# Altium PCB Pcb.PcbDoc
Units mil, origin at the board's own origin, x right, y up, seen from the top; angles counter-clockwise.
Board outline 3543.32 x 3543.32 mil, 2 copper layers (Top Layer, Bottom Layer); 33 components, 119 nets, 297 pads, 74 vias.
Unrouted connection lines stored in the file: 2.
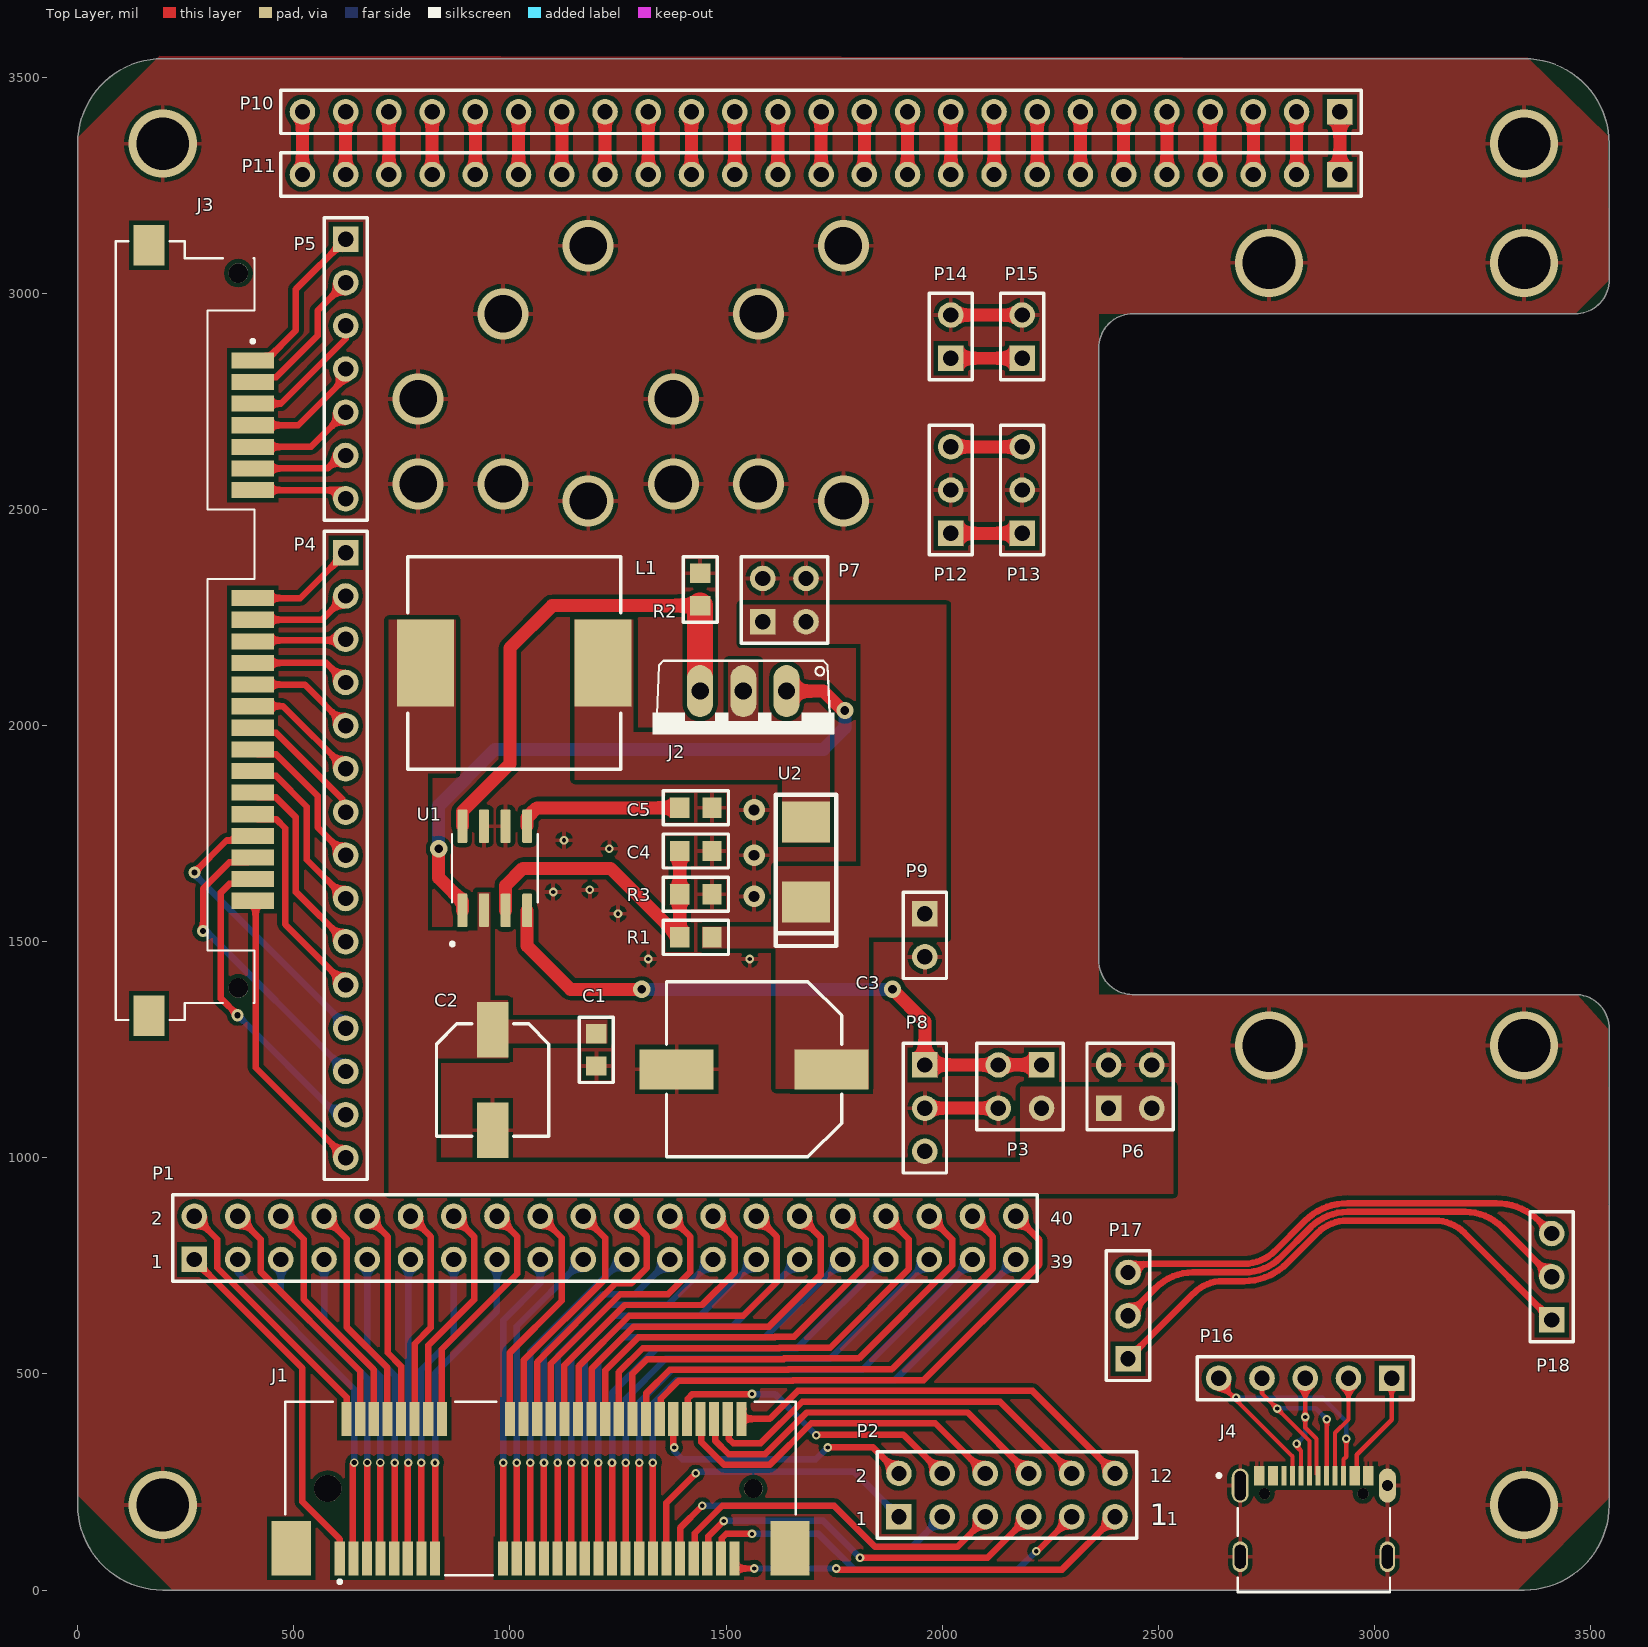
[diagram p0: Top Layer view]
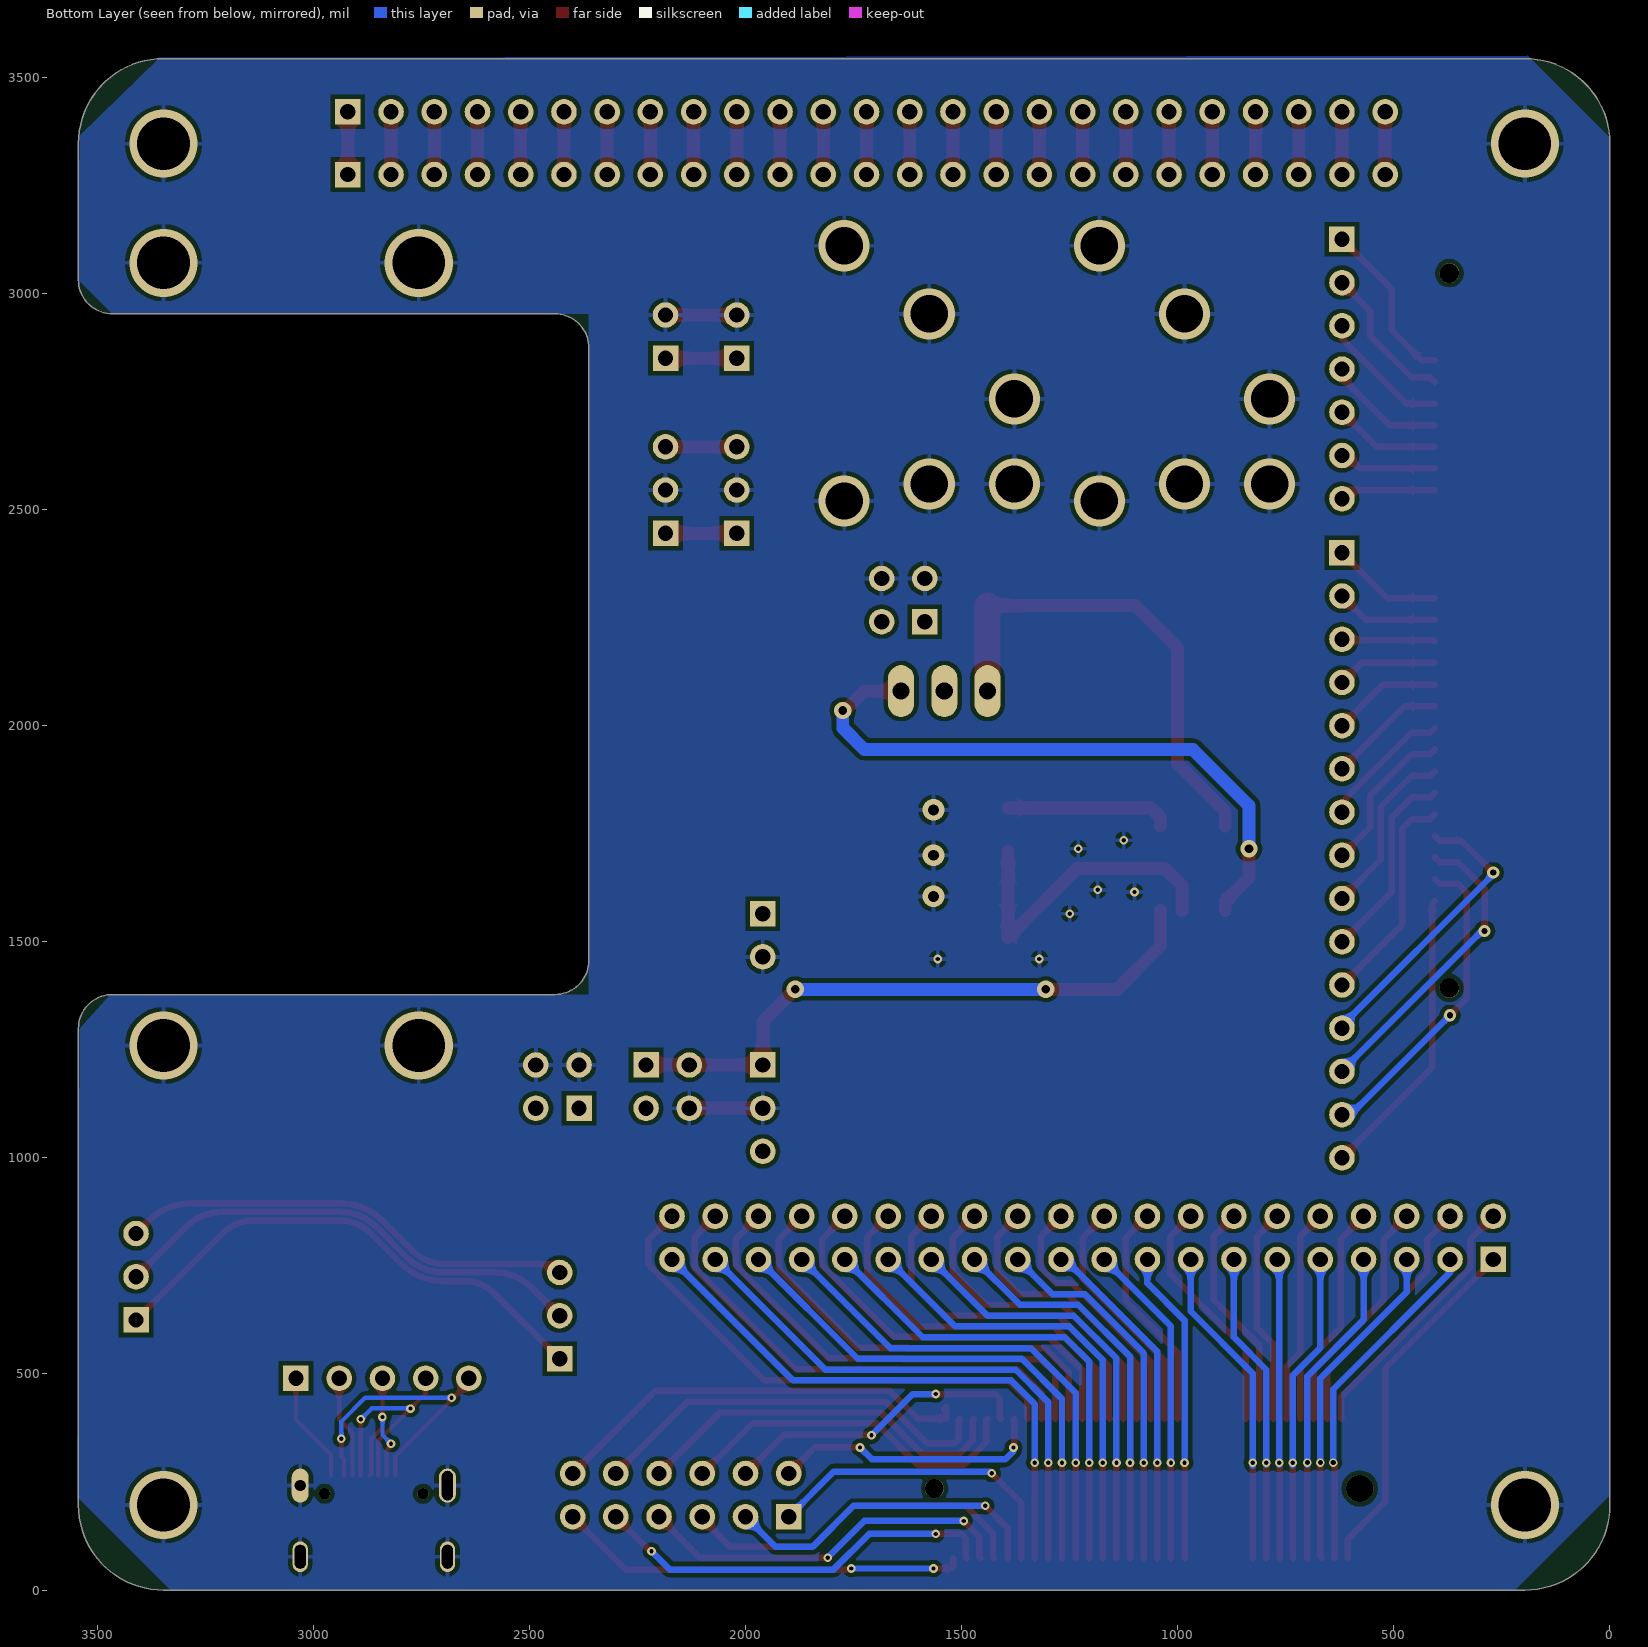
[diagram p1: Bottom Layer view, seen from below]

## Layer stack, top to bottom
Top Solder: solder mask 0.4, Solder Resist, Dk 3.5
Top Layer: signal copper 1.4
Dielectric 1: dielectric 12.6, FR-4, Dk 4.8
Bottom Layer: signal copper 1.4
Bottom Solder: solder mask 0.4, Solder Resist, Dk 3.5

## Board outline
-0.01,196.86 ccw(c196.85,196.86) 196.85,0 196.85,0.01 3346.46,0.01 3346.46,0 ccw(c3346.46,196.86) 3543.31,196.86 3543.31,1299.21 ccw(c3464.57,1299.21) 3464.57,1377.95 2440.94,1377.95 cw(c2440.94,1456.69) 2362.2,1456.69 2362.2,2874.02 cw(c2440.94,2874.02) 2440.94,2952.76 3464.57,2952.76 ccw(c3464.57,3031.5) 3543.31,3031.5 3543.31,3346.46 ccw(c3346.46,3346.46) 3346.46,3543.32 3346.46,3543.31 196.85,3543.31 196.85,3543.32 ccw(c196.85,3346.46) -0.01,3346.46 0,3346.46

## Design rules (kind name [scope] priority, off if disabled: settings)
Clearance [All] p1: gap=10 ignorepadtopadclearanceinfootprint=FALSE except(0: Arc-Hole Track-Hole SMDPad-Hole THPad-Hole Via-Hole Fill-Hole Poly-Hole Region-Hole Text-Hole; 5: Arc-Arc Arc-Track Arc-SMDPad Arc-Via Track-Track Track-SMDPad Track-Via SMDPad-SMDPad SMDPad-Via)
PolygonConnect PolygonConnect_3 [All vs IsNamedPolygon('Top Layer-12V')] p1: connectstyle=Direct reliefconductorwidth=10 reliefentries=4 polygonreliefangle="90 Angle" airgapwidth=10
PolygonConnect PolygonConnect_2 [All vs IsNamedPolygon('Top Layer-NetJ2_2')] p2: connectstyle=Direct reliefconductorwidth=10 reliefentries=4 polygonreliefangle="90 Angle" airgapwidth=10
PolygonConnect PolygonConnect_1 [All vs IsNamedPolygon('Top Layer-VH')] p3: thpad.connectstyle=Direct thpad.reliefconductorwidth=10 thpad.reliefentries=4 thpad.polygonreliefangle="90 Angle" thpad.airgapwidth=10 smdpad.connectstyle=Direct smdpad.reliefconductorwidth=10 smdpad.reliefentries=4 smdpad.polygonreliefangle="90 Angle" smdpad.airgapwidth=10 via.connectstyle=Relief via.reliefconductorwidth=10 via.reliefentries=4 via.polygonreliefangle="90 Angle" via.airgapwidth=10
PolygonConnect [All] p4: connectstyle=Relief reliefconductorwidth=10 reliefentries=4 polygonreliefangle="90 Angle" airgapwidth=10
RoutingVias [All] p1: holewidth=28 width=50 viastyle="Through Hole" minholewidth=5 minwidth=10 maxholewidth=196.85 maxwidth=314.96
SolderMaskExpansion [All] p1: expansion=4
Width [All] p1: maxlimit=100 minlimit=10 preferedwidth=10
30 further rules are at their usual default settings.

## Components (designator, comment, footprint, x,y, rotation, side; value= is the part's Value field where it differs from the comment)
C1 "100nF" 0805 1200,1250 r270 top
C2 "220uF" CAPAE7666X77M_6-3x7-7 960,1180 r270 top
C3 "10uF 250V" CAPAE113103X125M_10x12-5 1565,1205 r180 top
C4 "100nF" 0805 1430,1710 r0 top
C5 "100nF" 0805 1430,1810 r0 top
J1 "PCIE-52P-67910-5700" PCIE-52P-67910-5700 1000,235 r0 top
J2 "IRF840" TO220V 1540,1980 r180 top
J3 "SATA00100251" AMPHENOL_SATA00100251 371.54,2220 r270 top locked
J4 "USB_C_16P" USB_C_16P_CSP-USC16-TR 2859.84,265 r0 top locked
L1 "330uH" INDP125125X80N 1010,2145 r0 top
P1 "Header 20X2" HDR2X20 270,765 r0 top
P2 "Header 6X2" HDR2X6 1900,170 r0 top
P3 "Header 2X2" HDR2X2 2230,1215 r180 top
P4 "Header 15" HDR1X15 620,2400 r270 top locked
P5 "Header 7" HDR1X7 620,3125 r270 top locked
P6 "Header 2X2" HDR2X2 2385,1115 r0 top
P7 "Header 2X2" HDR2X2 1585,2240.59 r0 top
P8 "Header 3" HDR1X3 1960,1215 r270 top
P9 "Header 2" HDR1X2 1960,1565 r270 top
P10 "Header 25" HDR1X25 2920,3420 r180 top locked
P11 "Header 25" HDR1X25 2920,3275 r180 top locked
P12 "Header 3" HDR1X3 2020,2445 r90 top locked
P13 "Header 3" HDR1X3 2185,2445 r90 top locked
P14 "Header 2" HDR1X2 2020,2850 r90 top locked
P15 "Header 2" HDR1X2 2185,2850 r90 top locked
P16 "Header 5" HDR1X5 3040,490 r180 top
P17 "Header 3" HDR1X3 2430,535 r90 top
P18 "Header 3" HDR1X3 3410,625 r90 top
R1 "220K" 0805 1430,1510 r180 top
R2 "50m" 0805 1440,2315 r90 top
R3 "2K" 0805 1430,1610 r0 top
U1 "MAX1771CSA" MAX1771CSA 965,1670 r90 top
U2 "MURS160" MURS160 1685,1730 r270 top

## Footprints (in the part's own frame and the unit in brackets; to place one, negate y for a bottom-side part, rotate by r counter-clockwise, add the part's x,y. Pads: shape width x height; smd on the part's side, far side on the other; paste and mask are expansions set on the pad)
0805 [mm]
  rect 1.14x1.2 smd: 1(-0.95,0) 2(0.95,0)
  silkscreen extent -1.92,-1 1.92,1, body extent -1,-0.6 1,0.6, height 0.45
AMPHENOL_SATA00100251 [mm]
  rect 0.95x2.5 smd mask+0.05: P1(-1.905,0.85) P2(-0.635,0.85) P3(0.635,0.85) P4(1.905,0.85) P5(3.175,0.85) P6(4.445,0.85) P7(5.715,0.85) P8(6.985,0.85) P9(8.255,0.85) P10(9.525,0.85) P11(10.795,0.85) P12(12.065,0.85) P13(13.335,0.85) P14(14.605,0.85) P15(15.875,0.85) S1(-15.875,0.85) S2(-14.605,0.85) S3(-13.335,0.85) S4(-12.065,0.85) S5(-10.795,0.85) S6(-9.525,0.85) S7(-8.255,0.85)
  rect 2.39x1.8 smd mask+0.05: SH1(-22.645,-5.25) SH2(22.645,-5.25)
  round 1.15 hole 1.15 unplated: ""(-21,0) ""(21,0)
  silkscreen extent -22.88,-7.2 22.88,0.95, body extent -23.4,-9.05 23.4,1.82, height 3.69
CAPAE7666X77M_6-3x7-7 [mm] "Aluminum Electrolytic Capacitor, Body 6.60x6.60x7.70mm, IPC Low Density"
  rect 3.25x1.85 smd: 1(-2.95,0) 2(2.95,0)
  silkscreen extent -3.3,-3.3 3.3,3.3, body extent -3.3,-3.3 3.3,3.3, height 7.7
CAPAE113103X125M_10x12-5 [mm] "Aluminum Electrolytic Capacitor, Body 10.30x10.30x12.50mm, IPC Low Density"
  rect 4.35x2.35 smd: 1(-4.55,0) 2(4.55,0)
  silkscreen extent -5.15,-5.15 5.15,5.15, body extent -5.15,-5.15 5.15,5.15, height 12.5
HDR1X2 [mm] "Connector; Header; 2 Position"
  rect 1.5x1.5 hole 0.9: 1(0,0)
  round 1.5 hole 0.9: 2(2.54,0)
  silkscreen extent -1.27,-1.27 3.81,1.27
HDR1X3 [mm] "Connector; Header; 3 Position"
  rect 1.5x1.5 hole 0.9: 1(0,0)
  round 1.5 hole 0.9: 2(2.54,0) 3(5.08,0)
  silkscreen extent -1.27,-1.27 6.35,1.27
HDR1X5 [mm] "Connector; Header; 5 Position"
  rect 1.5x1.5 hole 0.9: 1(0,0)
  round 1.5 hole 0.9: 2(2.54,0) 3(5.08,0) 4(7.62,0) 5(10.16,0)
  silkscreen extent -1.27,-1.27 11.43,1.27
HDR1X7 [mm] "Connector; Header; 7 Position"
  rect 1.5x1.5 hole 0.9: 1(0,0)
  round 1.5 hole 0.9: 2(2.54,0) 3(5.08,0) 4(7.62,0) 5(10.16,0) 6(12.7,0) 7(15.24,0)
  silkscreen extent -1.27,-1.27 16.51,1.27
HDR1X15 [mm] "Connector; Header; 15 Position"
  rect 1.5x1.5 hole 0.9: 1(0,0)
  round 1.5 hole 0.9: 2(2.54,0) 3(5.08,0) 4(7.62,0) 5(10.16,0) 6(12.7,0) 7(15.24,0) 8(17.78,0) 9(20.32,0) 10(22.86,0) 11(25.4,0) 12(27.94,0) 13(30.48,0) 14(33.02,0) 15(35.56,0)
  silkscreen extent -1.27,-1.27 36.83,1.27
HDR1X25 [mm] "Connector; Header; 25 Position"
  rect 1.5x1.5 hole 0.9: 1(0,0)
  round 1.5 hole 0.9: 2(2.54,0) 3(5.08,0) 4(7.62,0) 5(10.16,0) 6(12.7,0) 7(15.24,0) 8(17.78,0) 9(20.32,0) 10(22.86,0) 11(25.4,0) 12(27.94,0) 13(30.48,0) 14(33.02,0) 15(35.56,0) 16(38.1,0) 17(40.64,0) 18(43.18,0) 19(45.72,0) 20(48.26,0) 21(50.8,0) 22(53.34,0) 23(55.88,0) 24(58.42,0) 25(60.96,0)
  silkscreen extent -1.27,-1.27 62.23,1.27
HDR2X2 [mm] "Connector; Header; 2x2 Position"
  rect 1.5x1.5 hole 0.9: 1(0,0)
  round 1.5 hole 0.9: 2(0,2.54) 3(2.54,0) 4(2.54,2.54)
  silkscreen extent -1.27,-1.27 3.81,3.81
HDR2X6 [mm] "Connector; Header; 6x2 Position"
  rect 1.5x1.5 hole 0.9: 1(0,0)
  round 1.5 hole 0.9: 2(0,2.54) 3(2.54,0) 4(2.54,2.54) 5(5.08,0) 6(5.08,2.54) 7(7.62,0) 8(7.62,2.54) 9(10.16,0) 10(10.16,2.54) 11(12.7,0) 12(12.7,2.54)
  silkscreen extent -1.27,-1.27 13.97,3.81
HDR2X20 [mm] "Connector; Header; 20x2 Position"
  rect 1.5x1.5 hole 0.9: 1(0,0)
  round 1.5 hole 0.9: 2(0,2.54) 3(2.54,0) 4(2.54,2.54) 5(5.08,0) 6(5.08,2.54) 7(7.62,0) 8(7.62,2.54) 9(10.16,0) 10(10.16,2.54) 11(12.7,0) 12(12.7,2.54) 13(15.24,0) 14(15.24,2.54) 15(17.78,0) 16(17.78,2.54) 17(20.32,0) 18(20.32,2.54) 19(22.86,0) 20(22.86,2.54) 21(25.4,0) 22(25.4,2.54) 23(27.94,0) 24(27.94,2.54) 25(30.48,0) 26(30.48,2.54) 27(33.02,0) 28(33.02,2.54) 29(35.56,0) 30(35.56,2.54) 31(38.1,0) 32(38.1,2.54) 33(40.64,0) 34(40.64,2.54) 35(43.18,0) 36(43.18,2.54) 37(45.72,0) 38(45.72,2.54) 39(48.26,0) 40(48.26,2.54)
  silkscreen extent -1.27,-1.27 49.53,3.81
INDP125125X80N [mm] "Precision Wire Wound Inductor, 2-Leads, Body 12.50x12.50mm, IPC Medium Density"
  rect 3.35x5.1 smd: 1(-5.225,0) 2(5.225,0)
  silkscreen extent -6.25,-6.25 6.25,6.25, body extent -6.25,-6.25 6.25,6.25, height 8
MAX1771CSA [mm]
  rrect25% 1.97x0.59 smd: 1(-2.475,1.905) 2(-2.475,0.635) 3(-2.475,-0.635) 4(-2.475,-1.905) 5(2.475,-1.905) 6(2.475,-0.635) 7(2.475,0.635) 8(2.475,1.905)
  silkscreen extent -4.54,-2.52 2,2.59, body extent -3,-2.45 3,2.45, height 1.75
MURS160 [mm]
  rect 2.4x2.8 smd: 1(-1.2,0) 2(3.5,0)
  silkscreen extent -2.79,-1.78 6.1,1.78
PCIE-52P-67910-5700 [mm]
  rect 0.6x2 smd: 1(-10,-4.1) 2(-9.6,4.1) 3(-9.2,-4.1) 4(-8.8,4.1) 5(-8.4,-4.1) 6(-8,4.1) 7(-7.6,-4.1) 8(-7.2,4.1) 9(-6.8,-4.1) 10(-6.4,4.1) 11(-6,-4.1) 12(-5.6,4.1) 13(-5.2,-4.1) 14(-4.8,4.1) 15(-4.4,-4.1) 16(-4,4.1) 17(-0.4,-4.1) 18(0,4.1) 19(0.4,-4.1) 20(0.8,4.1) 21(1.2,-4.1) 22(1.6,4.1) 23(2,-4.1) 24(2.4,4.1) 25(2.8,-4.1) 26(3.2,4.1) 27(3.6,-4.1) 28(4,4.1) 29(4.4,-4.1) 30(4.8,4.1) 31(5.2,-4.1) 32(5.6,4.1) 33(6,-4.1) 34(6.4,4.1) 35(6.8,-4.1) 36(7.2,4.1) 37(7.6,-4.1) 38(8,4.1) 39(8.4,-4.1) 40(8.8,4.1) 41(9.2,-4.1) 42(9.6,4.1) 43(10,-4.1) 44(10.4,4.1) 45(10.8,-4.1) 46(11.2,4.1) 47(11.6,-4.1) 48(12,4.1) 49(12.4,-4.1) 50(12.8,4.1) 51(13.2,-4.1) 52(13.6,4.1)
  rect 2.3x3.2 smd: 53(-12.85,-3.5) 54(16.45,-3.5)
  round 1.6 hole 1.6 unplated: ""(-10.7,0)
  round 1.1 hole 1.1 unplated: ""(14.3,0)
  silkscreen extent -13.2,-5.57 16.8,5.1
TO220V [mil]
  oval 60x120 hole 40: 1(-100,-100) 2(0,-100) 3(100,-100)
  silkscreen extent -210,-170 210,0, body extent -202,-88 202,88, height 750
USB_C_16P_CSP-USC16-TR [mm]
  rect 0.3x1.14 smd: A1(-3.35,0) A4(-2.55,0) A5(-1.25,0) A6(-0.25,0) A7(0.25,0) A8(1.25,0) A9(2.55,0) A12(3.35,0) B1(3.05,0) B4(2.25,0) B5(1.75,0) B6(0.75,0) B7(-0.75,0) B8(-1.75,0) B9(-2.25,0) B12(-3.05,0)
  oval 1x2 hole 0.65 slot 1.72 at 90 deg: S1(-4.325,-0.59)
  oval 1x2 hole 0.65: S2(4.325,-0.59)
  oval 0.9x1.8 hole 0.65 slot 1.4 at 90 deg: S3(-4.325,-4.77) S4(4.325,-4.77)
  round 0.65 hole 0.65 unplated: ""(-2.89,-1.07) ""(2.89,-1.07)
  silkscreen extent -5.67,-6.86 4.47,0.1, body extent -4.47,-6.28 4.47,1.47, height 3.26

## Part data
C1 C4 C5: library part Capacitor
C2 C3: library part CapacitorPolarized
J1: "Conn Mini PCI Express Card Edge F 52 POS 0.8mm Solder RA SMD Mini PCI Express Embossed T/R", Package=None, Availability=Unavailable, MP=67910-5700, Price=None
J2: "N-Channel 500 V 8A (Tc) 3.1W (Tc) Through Hole TO-220FP", Package="TO-220 Vishay", Availability="In Stock", Check_prices=https://www.snapeda.com/parts/IRF630/STMicroelectronics/view-part/?ref=eda, MF=STMicroelectronics, MP=IRF630, Price=None, Purchase-URL=https://pricing.snapeda.com/search/part/IRF630/?ref=eda, SnapEDA_Link=https://www.snapeda.com/parts/IRF630/STMicroelectronics/view-part/?ref=snap
J3: "I/O Connectors SATA RA PLUG", Package=None, Availability="In Stock", Check_prices=https://www.snapeda.com/parts/SATA00100251/Amphenol/view-part/?ref=eda, MF="Amphenol FCI", MP=SATA00100251, Price=None, Purchase-URL=https://pricing.snapeda.com/search/part/SATA00100251/?ref=eda, SnapEDA_Link=https://www.snapeda.com/parts/SATA00100251/Amphenol/view-part/?ref=snap
J4: "CSP-USC16-TR Valcon USB Type C Surface Mount PCB Socket", Package=None, Availability="In Stock", Check_prices=https://www.snapeda.com/parts/CSP-USC16-TR/Valcon/view-part/?ref=eda, MF=Valcon, MP=CSP-USC16-TR, Price=None, Purchase-URL=https://pricing.snapeda.com/search/part/CSP-USC16-TR/?ref=eda, SnapEDA_Link=https://www.snapeda.com/parts/CSP-USC16-TR/Valcon/view-part/?ref=snap
L1: library part Inductor
P1: "Header, 20-Pin, Dual row", LatestRevisionDate=17-Jul-2002, LatestRevisionNote="Re-released for DXP Platform.", Publisher="Altium Limited"
P2: "Header, 6-Pin, Dual row", LatestRevisionDate=17-Jul-2002, LatestRevisionNote="Re-released for DXP Platform.", Publisher="Altium Limited"
P3 P6 P7: "Header, 2-Pin, Dual row", LatestRevisionDate=17-Jul-2002, LatestRevisionNote="Re-released for DXP Platform.", Publisher="Altium Limited"
P4: "Header, 15-Pin", LatestRevisionDate=17-Jul-2002, LatestRevisionNote="Re-released for DXP Platform.", Publisher="Altium Limited"
P5: "Header, 7-Pin", LatestRevisionDate=17-Jul-2002, LatestRevisionNote="Re-released for DXP Platform.", Publisher="Altium Limited"
P8 P12 P13 P17 P18: "Header, 3-Pin", LatestRevisionDate=17-Jul-2002, LatestRevisionNote="Re-released for DXP Platform.", Publisher="Altium Limited"
P9 P14 P15: "Header, 2-Pin", LatestRevisionDate=17-Jul-2002, LatestRevisionNote="Re-released for DXP Platform.", Publisher="Altium Limited"
P10 P11: "Header, 25-Pin", LatestRevisionDate=17-Jul-2002, LatestRevisionNote="Re-released for DXP Platform.", Publisher="Altium Limited"
P16: "Header, 5-Pin", LatestRevisionDate=17-Jul-2002, LatestRevisionNote="Re-released for DXP Platform.", Publisher="Altium Limited"
R1 R2 R3: library part Resistor
U1: "Boost, Buck-Boost Regulator Positive Output Step-Up, Step-Up/Step-Down - DC-DC Controller IC 8-SOIC", Package="SOIC-8 Maxim", Availability="In Stock", Check_prices=https://www.snapeda.com/parts/MAX1771CSA/Maxim+Integrated/view-part/?ref=eda, MF="Maxim Integrated", MP=MAX1771CSA, Price=None, Purchase-URL=https://pricing.snapeda.com/search/part/MAX1771CSA/?ref=eda, SnapEDA_Link=https://www.snapeda.com/parts/MAX1771CSA/Maxim+Integrated/view-part/?ref=snap
U2: "Diode Standard 600V 1A Surface Mount SMB", Package="DO-214AA-214 World Products", Availability=Unavailable, MF="World Products", MP=MURS160, Price=None, SnapEDA_Link=https://www.snapeda.com/parts/MURS160/World%20Products/view-part/564901/?ref=snap

## Via types
v1: diameter 20, hole 10, Top Layer to Bottom Layer, 41 vias
v2: diameter 118.11, hole 86.61, Top Layer to Bottom Layer, 12 vias
v3: diameter 157.48, hole 122.05, Top Layer to Bottom Layer, 8 vias
v4: diameter 40, hole 20, Top Layer to Bottom Layer, 4 vias
v5: diameter 50, hole 25, Top Layer to Bottom Layer, 3 vias
v6: diameter 20, hole 12, Top Layer to Bottom Layer, 3 vias
v7: diameter 28, hole 14, Top Layer to Bottom Layer, 3 vias

## Nets (pads, with @x,y where several pads share a name; then routed paths per layer and width w, separated by ;. In a path a pad name is that pad's centre, name@x,y a point inside that pad or via, vN(x,y) a via of type N, cw(c..) or ccw(c..) an arc to the next point about the centre after c; other vN are vias at no path point)
12V: C1.1 C2.1 L1.1 P3.2 P6.1 P6.3 P8.3 U1.2
CC: J4.A5 J4.B5 P16.5 | length 704
  Top Layer w10: P16.5 2640,480 2675,445 v1(2680,445) 2680,440 2810.63,309.37 J4.A5 ; J4.B5 2928.74,302.44 2935,308.7 v1(2935,350)
  Bottom Layer w10: v1(2680,445) 2880,445 2935,390 v1(2935,350)
CONNECT_1: P10.1 P11.1 | length 145
  Top Layer w30: P11.1 P10.1
CONNECT_2: P10.2 P11.2 | length 145
  Top Layer w30: P11.2 P10.2
CONNECT_3: P10.3 P11.3 | length 145
  Top Layer w30: P11.3 P10.3
CONNECT_4: P10.4 P11.4 | length 145
  Top Layer w30: P11.4 P10.4
CONNECT_5: P10.5 P11.5 | length 145
  Top Layer w30: P11.5 P10.5
CONNECT_6: P10.6 P11.6 | length 145
  Top Layer w30: P11.6 P10.6
CONNECT_7: P10.7 P11.7 | length 145
  Top Layer w30: P11.7 P10.7
CONNECT_8: P10.8 P11.8 | length 145
  Top Layer w30: P11.8 P10.8
CONNECT_9: P10.9 P11.9 | length 145
  Top Layer w30: P11.9 P10.9
CONNECT_10: P10.10 P11.10 | length 145
  Top Layer w30: P11.10 P10.10
CONNECT_11: P10.11 P11.11 | length 145
  Top Layer w30: P11.11 P10.11
CONNECT_12: P10.12 P11.12 | length 145
  Top Layer w30: P11.12 P10.12
CONNECT_13: P10.13 P11.13 | length 145
  Top Layer w30: P11.13 P10.13
CONNECT_14: P10.14 P11.14 | length 145
  Top Layer w30: P11.14 P10.14
CONNECT_15: P10.15 P11.15 | length 145
  Top Layer w30: P11.15 P10.15
CONNECT_16: P10.16 P11.16 | length 145
  Top Layer w30: P11.16 P10.16
CONNECT_17: P10.17 P11.17 | length 145
  Top Layer w30: P11.17 P10.17
CONNECT_18: P10.18 P11.18 | length 145
  Top Layer w30: P11.18 P10.18
CONNECT_19: P10.19 P11.19 | length 145
  Top Layer w30: P11.19 P10.19
CONNECT_20: P10.20 P11.20 | length 145
  Top Layer w30: P11.20 P10.20
CONNECT_21: P10.21 P11.21 | length 145
  Top Layer w30: P11.21 P10.21
CONNECT_22: P10.22 P11.22 | length 145
  Top Layer w30: P11.22 P10.22
CONNECT_23: P10.23 P11.23 | length 145
  Top Layer w30: P11.23 P10.23
CONNECT_24: P10.24 P11.24 | length 145
  Top Layer w30: P11.24 P10.24
CONNECT_25: P10.25 P11.25 | length 145
  Top Layer w30: P11.25 P10.25
CURVE_1: P17.1 P18.1 | length 1189
  Top Layer w15: P17.1 2581.72,686.72 cw(c2650,618.43) 2650,715 2698.58,715 ccw(c2698.58,855) 2797.57,756.01 2867.28,825.71 cw(c2937.99,755) 2937.99,855 3138.58,855 cw(c3138.58,755) 3209.29,825.71 P18.1
CURVE_2: P17.2 P18.2 | length 1120.9
  Top Layer w15: P17.2 2494.85,699.85 cw(c2579.71,615) 2579.71,735 2698.58,735 ccw(c2698.58,855) 2783.43,770.15 2853.14,839.85 cw(c2937.99,755) 2937.99,875 3210.29,875 cw(c3210.29,755) 3295.15,839.85 P18.2
CURVE_3: P17.3 P18.3 | length 1056
  Top Layer w15: P17.3 cw(c2478.28,686.72) 2478.28,755 2698.58,755 ccw(c2698.58,855) 2769.29,784.29 2838.99,853.99 cw(c2937.99,755) 2937.99,895 3282.01,895 cw(c3282.01,755) 3381.01,853.99 P18.3
DN: J4.A7 J4.B7 P16.3 | length 385.5
  Top Layer w10: v1(2820,338.85) 2820,332.71 2830.31,322.39 J4.B7 ; P16.3 v1(2840,400.64) 2840,376.21 2865.91,350.31 2865.91,268.78 J4.A7
  Bottom Layer w10: v1(2820,338.85) 2840,358.85 v1(2840,400.64)
DP: J4.A6 J4.B6 P16.4 | length 526.7
  Top Layer w10: P16.4 2740,455 2850,345 J4.A6 ; J4.B6 2890,265.63 v1(2890,395)
  Bottom Layer w10: v1(2775,420) 2775.64,420.64 2864.36,420.64 v1(2890,395)
EXT: J2.1 U1.1 | length 1473.4
  Top Layer w30: v4(835,1715) 835,1647.95 890,1592.95 U1.1 ; J2.1 1725,2080 1770,2035 v4(1775,2035)
  Bottom Layer w30: v4(835,1715) 835,1815 965,1945 1725,1945 1775,1995 v4(1775,2035)
EXT_12V: P12.3 P13.3 | length 165
  Top Layer w30: P12.3 P13.3
EXT_SHDN: P12.1 P13.1 | length 165
  Top Layer w30: P12.1 P13.1
EXT_VH: P14.1 P15.1 | length 165
  Top Layer w30: P14.1 P15.1
FB: C4.1 R1.2 R3.1 U1.3 | length 742.9
  Top Layer w30: U1.3 990,1630 1030,1670 1232.6,1670 R1.2 R3.1 C4.1
GND: C1.2 C2.2 C3.2 C4.2 C5.2 J4.A1 J4.A12 J4.B1 J4.B12 J4.S1 J4.S2 J4.S3 J4.S4 P3.4 P6.2 P6.4 P7.2 P7.4 P8.2 P9.2 P12.2 P13.2 P14.2 P15.2 R2.2 R3.2 U1.6 U1.7 | length 335
  Top Layer w30: P8.2 P3.4 ; P14.2 P15.2
  other v1: 1320,1460 1555,1460 1250,1565 1100,1615 1185,1620 1230,1715 1125,1735
  other v2: 1181.1,2519.68 1771.65,2519.68 787.4,2559.06 984.25,2559.06 1377.95,2559.06 1574.8,2559.06 787.4,2755.91 1377.95,2755.91 984.25,2952.76 1574.8,2952.76 1181.1,3110.24 1771.65,3110.24
  other v3: 196.84,196.85 3346.45,196.85 2755.91,1259.84 3346.46,1259.84 2755.91,3070.87 3346.46,3070.87 196.84,3346.46 3346.45,3346.46
  other v5: 1565,1605 1565,1700 1565,1805
NetC5_1: C5.1 U1.5 | length 382.2
  Top Layer w30: U1.5 1040,1787.83 1062.17,1810 C5.1
NetJ2_2: J2.2 L1.2 U2.1 | length 30
  Top Layer w30: J2.2@1540,2050 J2.2
NetJ2_3: J2.3 R2.1 U1.8 | length 1136.1
  Top Layer w30: U1.8 890,1801.49 1000,1911.49 1000,2180 1097.6,2277.6 R2.1
  Top Layer w60: J2.3 R2.1
PCIE_1: J1.1 P1.1 | length 830.7
  Top Layer w15: P1.1 270,763.14 520,513.14 520,204.32 606.3,118.02 J1.1
PCIE_2: J1.2 P1.2 | length 614.4
  Top Layer w15: P1.2 322.97,812.03 322.97,745.52 622.05,446.45 J1.2
PCIE_3: J1.3 P1.3 | length 805.3
  Top Layer w15: J1.3 636.4,74.98 636.4,291.4 v6(640,295)
  Bottom Layer w15: P1.3 370,735 640,465 v6(640,295)
PCIE_4: J1.4 P1.4 | length 586
  Top Layer w15: P1.4 422.97,812.03 422.97,737.03 653.54,506.46 J1.4
PCIE_5: J1.5 P1.5 | length 773.5
  Top Layer w15: J1.5@667.5,75.37 670,77.87 v6(670,295)
  Bottom Layer w15: P1.5 470,689.64 670,489.64 v6(670,295)
PCIE_6: J1.6 P1.6 | length 557.7
  Top Layer w15: P1.6 522.97,812.03 522.97,672.38 685.04,510.32 J1.6
PCIE_7: J1.7 P1.7 | length 745.6
  Top Layer w15: v6@700,290 700,74.37 J1.7
  Bottom Layer w15: P1.7 570,625 700,495 v6(700,295) v6@700,290
PCIE_8: J1.8 P1.8 | length 529.3
  Top Layer w15: P1.8 622.97,812.03 622.97,607.74 716.54,514.18 J1.8
PCIE_9: J1.9 P1.9 | length 718.3
  Top Layer w15: J1.9 733.64,74.94 v1@733.64,288.64
  Bottom Layer w15: P1.9 670,560.36 733.64,496.71 v1(733.64,295) v1@733.64,288.64
PCIE_10: J1.10 P1.10 | length 500.9
  Top Layer w15: P1.10 717.03,817.97 717.03,549.04 748.03,518.03 J1.10
PCIE_11: J1.11 P1.11 | length 694
  Top Layer w15: J1.11 763.78,288.78 v1@765,290
  Bottom Layer w15: v1@765,290 765,760 P1.11
  other v1: 765,295
PCIE_12: J1.12 P1.12 | length 503.6
  Top Layer w15: P1.12 817.03,817.97 817.03,607.38 779.53,569.88 J1.12
PCIE_13: J1.13 P1.13 | length 722.6
  Top Layer w15: v1@795,290 795,73.86 J1.13
  Bottom Layer w15: v1@795,290 v1(795,295) 795,510 870,585 P1.13
PCIE_14: J1.14 P1.14 | length 532
  Top Layer w15: J1.14 811.02,566.02 917.03,672.03 917.03,817.97 P1.14
PCIE_15: J1.15 P1.15 | length 750.7
  Top Layer w15: J1.15 v1@826.77,288.23
  Bottom Layer w15: v1@826.77,288.23 v1(826.77,295) 826.77,501.77 970,645 P1.15
PCIE_16: J1.16 P1.16 | length 560.3
  Top Layer w15: J1.16 842.52,557.52 1017.03,732.03 1017.03,817.97 P1.16
PCIE_17: J1.17 P1.17 | length 726.9
  Top Layer w15: J1.17 v1(984.25,295)
  Bottom Layer w15: v1(984.25,295) 984.25,623.9 1070,709.64 P1.17
PCIE_18: J1.18 P1.18 | length 539
  Top Layer w15: J1.18 1000,549.64 1120,669.64 1120,815 P1.18
PCIE_19: J1.19 P1.19 | length 755.3
  Top Layer w15: J1.19 v1(1015.75,295)
  Bottom Layer w15: v1(1015.75,295) 1015.75,610.75 P1.19
PCIE_20: J1.20 P1.20 | length 567.4
  Top Layer w15: J1.20 1031.5,531.5 1220,720 1220,815 P1.20
PCIE_21: J1.21 P1.21 | length 789.5
  Top Layer w15: J1.21 v1(1047.24,295)
  Bottom Layer w15: v1(1047.24,295) 1047.24,552.24 1260,765 P1.21
PCIE_22: J1.22 P1.22 | length 614.5
  Top Layer w15: J1.22 1062.99,527.64 1245,709.64 1281.15,709.64 1317.03,745.52 1317.03,817.97 P1.22
PCIE_23: J1.23 P1.23 | length 855.8
  Top Layer w15: J1.23 v1(1078.74,295)
  Bottom Layer w15: v1(1078.74,295) 1078.74,548.38 1215.36,685 1290,685 P1.23
PCIE_24: J1.24 P1.24 | length 686.4
  Top Layer w15: J1.24 1094.49,523.78 1255.36,684.64 1365.86,684.64 1417.03,735.81 1417.03,817.97 P1.24
PCIE_25: J1.25 P1.25 | length 919.5
  Top Layer w15: J1.25 v1(1110.24,295)
  Bottom Layer w15: v1(1110.24,295) 1110.24,540.24 1230,660 1365,660 P1.25
PCIE_26: J1.26 P1.26 | length 757.3
  Top Layer w15: J1.26 1125.98,519.92 1265.71,659.64 1444.64,659.64 1520,735 1520,815 P1.26
PCIE_27: J1.27 P1.27 | length 985.8
  Top Layer w15: J1.27 v1(1141.73,295)
  Bottom Layer w15: v1(1141.73,295) 1141.73,536.38 1240.36,635 1440,635 P1.27
PCIE_28: J1.28 P1.28 | length 832.8
  Top Layer w15: J1.28 1159.67,398.6 1159.67,518.24 1276.07,634.64 1539.64,634.64 1617.03,712.03 1617.03,817.97 P1.28
PCIE_29: J1.29 P1.29 | length 1052
  Top Layer w15: J1.29 v1(1173.23,295)
  Bottom Layer w15: v1(1173.23,295) 1173.23,532.52 1250.71,610 1515,610 P1.29
PCIE_30: J1.30 P1.30 | length 891.7
  Top Layer w15: J1.30 1188.98,512.2 1286.42,609.64 1599.64,609.64 1718.79,728.79 1718.79,816.21 P1.30
PCIE_31: J1.31 P1.31 | length 1118.2
  Top Layer w15: J1.31 v1(1204.72,295)
  Bottom Layer w15: v1(1204.72,295) 1204.72,528.66 1261.07,585 1590,585 P1.31
PCIE_32: J1.32 P1.32 | length 950.6
  Top Layer w15: J1.32 1220.47,508.34 1296.78,584.64 1612.91,584.64 1614.18,585.92 1657.42,585.92 1822.97,751.47 1822.97,812.03 P1.32
PCIE_33: J1.33 P1.33 | length 1144.3
  Top Layer w15: J1.33 v1(1236.22,295)
  Bottom Layer w15: v1(1236.22,295) 1236.22,456.22 1340,560 1665,560 P1.33
PCIE_34: J1.34 P1.34 | length 1021.8
  Top Layer w15: J1.34 1251.97,504.48 1307.13,559.64 1623.27,559.64 1624.54,560.92 1740.92,560.92 1922.97,742.97 1922.97,812.03 P1.34
PCIE_35: J1.35 P1.35 | length 1204.7
  Top Layer w15: J1.35 v1(1267.72,295)
  Bottom Layer w15: v1(1267.72,295) 1267.72,442.36 1360.36,535 1740,535 P1.35
PCIE_36: J1.36 P1.36 | length 1083.1
  Top Layer w15: J1.36 1283.46,500.62 1317.49,534.64 1633.62,534.64 1634.89,535.92 1807.42,535.92 2022.97,751.47 2022.97,812.03 P1.36
PCIE_37: J1.37 P1.37 | length 1268.4
  Top Layer w15: J1.37 v1(1299.21,295)
  Bottom Layer w15: v1(1299.21,295) 1299.21,434.21 1375,510 1815,510 P1.37
PCIE_38: J1.38 P1.38 | length 1120.8
  Top Layer w15: J1.38 1314.96,454.96 1369.64,509.64 1643.98,509.64 1645.25,510.92 1883.89,510.92 2117.03,744.06 2117.03,817.97 P1.38
PCIE_39: J1.39 P1.39 | length 1334.7
  Top Layer w15: J1.39 v1(1330.71,295)
  Bottom Layer w15: v1(1330.71,295) 1330.71,430.35 1385.36,485 1890,485 P1.39
PCIE_40: J1.40 P1.40 | length 1186.8
  Top Layer w15: J1.40 1348.64,398.6 1348.64,443.04 1390.25,484.64 1654.33,484.64 1655.61,485.92 1957.42,485.92 2225,753.49 2225,810 P1.40
PCIE_41: J1.41 P2.1 | length 739.4
  Top Layer w15: J1.41 1362.2,202.2 v1(1430,270)
  Bottom Layer w15: v1(1430,270) 1434.15,274.15 1795.85,274.15 P2.1
PCIE_42: J1.42 P2.2 | length 643.2
  Top Layer w15: v1(1380,330) 1377.95,332.05 J1.42 J1.42@1380.14,394.23 ; v1(1735,330) 1840,330 P2.2
  Bottom Layer w15: v1(1380,330) 1380,321.11 1398.61,302.5 1707.5,302.5 v1(1735,330)
PCIE_43: J1.43 P2.3 | length 766
  Top Layer w15: J1.43 1393.7,143.7 v1(1445,195)
  Bottom Layer w15: v1(1445,195) 1750,195 1845,100 1930,100 P2.3
PCIE_44: J1.44 P2.4 | length 718.5
  Top Layer w15: J1.44 1410,395.87 1411.63,397.5 1411.63,443.04 1422.26,453.66 v1(1559.98,453.66) ; v1(1708.42,358.42) 1709.64,359.64 1910.36,359.64 P2.4
  Bottom Layer w15: v1(1559.98,453.66) 1613.17,453.66 v1(1708.42,358.42)
PCIE_45: J1.45 P2.5 | length 828.9
  Top Layer w15: J1.45 1427.38,75.77 1427.38,131.27 1491.11,195 1750,195 1845,100 2035,100 2100,165 P2.5
PCIE_46: J1.46 P2.6 | length 821.8
  Top Layer w15: J1.46 1443.13,394.23 1443.13,342.08 1495.66,289.55 1600.66,289.55 1697.03,385.92 1984.08,385.92 P2.6
PCIE_47: J1.47 P2.7 | length 882
  Top Layer w15: J1.47 1458.88,75.77 1458.88,124.06 1494.82,160 v1(1495,160) ; v1(1810,75) 2105,75 P2.7
  Bottom Layer w15: v1(1495,160) 1725,160 v1(1810,75)
PCIE_48: J1.48 P2.8 | length 888
  Top Layer w15: J1.48 1474.63,394.23 1474.63,345.94 1506.02,314.55 1590.3,314.55 1686.67,410.92 2059.08,410.92 P2.8
PCIE_49: J1.49 P2.9 | length 946.5
  Top Layer w15: J1.49 1490.37,75.77 1490.37,120.2 1500.63,130.45 1559.55,130.45 v1(1560,130) ; v1(2217.5,90) 2220,90 P2.9
  Bottom Layer w15: v1(1560,130) 1713.89,130 1796.39,47.5 2175,47.5 v1(2217.5,90)
PCIE_50: J1.50 P2.10 | length 954.3
  Top Layer w15: J1.50 1506.12,394.23 1506.12,349.8 1516.37,339.55 1579.95,339.55 1676.32,435.92 2134.08,435.92 P2.10
PCIE_51: J1.51 P2.11 | length 953.1
  Top Layer w15: J1.51 1519.68,54.31 1524,50 v1(1565,50) ; v1(1755,50) 1757.5,47.5 2277.5,47.5 P2.11
  Bottom Layer w15: v1(1565,50) v1(1755,50)
PCIE_52: J1.52 P2.12 | length 1005.6
  Top Layer w15: J1.52@1540.86,418.55 1535.43,423.98 J1.52 1601.46,396.42 1665.96,460.92 2209.08,460.92 P2.12
SATA_P1: J3.P1 P4.1 | length 258.5
  Top Layer w15: J3.P1 515,2295 P4.1
SATA_P2: J3.P2 P4.2 | length 237.8
  Top Layer w15: J3.P2 565,2245 P4.2
SATA_P3: J3.P3 P4.3 | length 217.1
  Top Layer w15: J3.P3 407.5,2197.5 617.5,2197.5 P4.3
SATA_P4: J3.P4 P4.4 | length 233.6
  Top Layer w15: J3.P4 575,2145 P4.4
SATA_P5: J3.P5 P4.5 | length 254.4
  Top Layer w15: J3.P5 525,2095 P4.5
SATA_P6: J3.P6 P4.6 | length 275.1
  Top Layer w15: J3.P6 475,2045 P4.6
SATA_P7: J3.P7 P4.7 | length 309
  Top Layer w15: J3.P7 416.2,1983.8 458.86,1983.8 611.57,1831.09 611.57,1808.43 P4.7
SATA_P8: J3.P8 P4.8 | length 359
  Top Layer w15: J3.P8 416.2,1933.8 458.86,1933.8 555,1837.66 555,1765 P4.8
SATA_P9: J3.P9 P4.9 | length 409
  Top Layer w15: J3.P9 416.2,1883.8 458.86,1883.8 530,1812.66 530,1690 P4.9
SATA_P10: J3.P10 P4.10 | length 459
  Top Layer w15: J3.P10 416.2,1833.8 458.86,1833.8 505,1787.66 505,1615 P4.10
SATA_P11: J3.P11 P4.11 | length 509
  Top Layer w15: J3.P11 416.2,1783.8 458.86,1783.8 480,1762.66 480,1540 P4.11
SATA_P12: J3.P12 P4.12 | length 675.2
  Top Layer w15: v7(270,1660) 343.8,1733.8 393.8,1733.8 J3.P12
  Bottom Layer w15: v7(270,1660) 270,1656.48 620,1306.48 P4.12
SATA_P13: J3.P13 P4.13 | length 708.1
  Top Layer w15: v7(290,1525) 290,1622.66 351.14,1683.8 393.8,1683.8 J3.P13
  Bottom Layer w15: v7(290,1525) 292.49,1522.51 299.01,1522.51 620,1201.53 P4.13
SATA_P14: J3.P14 P4.14 | length 731.7
  Top Layer w15: v7(370,1330) 331.4,1368.6 331.4,1614.06 351.14,1633.8 393.8,1633.8 J3.P14
  Bottom Layer w15: v7(370,1330) 600,1100 P4.14
SATA_P15: J3.P15 P4.15 | length 684.1
  Top Layer w15: J3.P15 411.67,1588.33 411.67,1208.33 P4.15
SATA_S1: J3.S1 P5.1 | length 386.9
  Top Layer w15: J3.S1 435.51,2845 505,2914.49 505,3010 P5.1
SATA_S2: J3.S2 P5.2 | length 344
  Top Layer w15: J3.S2 416.2,2806.2 458.86,2806.2 555,2902.34 555,2960 P5.2
SATA_S3: J3.S3 P5.3 | length 307.1
  Top Layer w15: J3.S3 470,2745 620,2895 P5.3
SATA_S4: J3.S4 P5.4 | length 280.6
  Top Layer w15: J3.S4 510,2695 620,2805 P5.4
SATA_S5: J3.S5 P5.5 | length 248.1
  Top Layer w15: J3.S5 540,2645 P5.5
SATA_S6: J3.S6 P5.6 | length 227.4
  Top Layer w15: J3.S6 578.08,2595 608.08,2625 P5.6
SATA_S7: J3.S7 P5.7 | length 223.3
  Top Layer w15: J3.S7 600,2545 P5.7
SBU: J4.A8 J4.B8 P16.2 | length 237.8
  Top Layer w10: J4.A8 2909.06,364.06 2940,395 P16.2
SHDN: P3.1 P3.3 P8.1 U1.4 | length 1445
  Top Layer w30: U1.4 1040,1490 1140,1390 v4(1305,1390) ; v4(1885,1390) 1960,1315 P8.1 P3.3 P3.1
  Bottom Layer w30: v4(1305,1390) v4(1885,1390)
VBUS: J4.A4 J4.A9 J4.B4 J4.B9 P16.1 | length 258.5
  Top Layer w10: J4.A9@2959.02,265 2959.02,313.03 3040,394.02 P16.1
VH: C3.1 P7.1 P7.3 P9.1 R1.1 U2.2
pads on no net: J1. J1.53 J1.54 J3. J3.SH1 J3.SH2 J4.

## Polygon pours and split planes (outlines as drawn)
GND on Top Layer "Top Layer-No Net" (solid, pour order 12): 3540,3365 3355,3545 3344.77,3545 190,3550 0,3360 0,220 220,0 3330,0 3545,215 3540,1299.21 3469.54,1377.8 2362.2,1377.8 2362.2,2952.76 3464.57,2952.76 3543.31,3031.49
12V on Top Layer "Top Layer-12V" (solid, pour order 4): 2535,1065 2535,916.86 720,916.86 720,2245 875,2245 875,1890 810,1890 810,1525 925,1525 925,1615 955,1615 955,1365 995,1365 995,1320 1225,1320 1225,1265 995,1265 995,1230 830,1230 830,990 2180.73,990 2180.73,1165.73 2535,1165
NetJ2_2 on Top Layer "Top Layer-NetJ2_2" (solid, pour order 2): 1150,2245 1150,1875 1630,1875 1630,1730 1740,1730 1740,1980 1575,1980 1575,2150 1505,2150 1505,1980 1500,1985 1285,1985 1285,2245
VH on Top Layer "Top Layer-VH" (solid, pour order 0): 1615,1675 1755,1675 1785,1675 1811.85,1675 1811.85,2190 1535,2190 1535,2280 2010,2280 2010,1615 2010,1510 1830,1510 1830,1335 1830,1275 1830,1250 1830,1160 1615,1160 1615,1485 1445,1485 1445,1535 1615,1535
GND on Bottom Layer "Top Layer-No Net" (solid, pour order 6): 3540,3365 3355,3545 3344.77,3545 190,3550 0,3360 0,220 220,0 3330,0 3545,215 3540,1299.21 3469.54,1377.8 2362.2,1377.8 2362.2,2952.76 3464.57,2952.76 3543.31,3031.49

## Silkscreen, mask and mechanical layers (free items; w line width, h text height)
Top Solder:
  drawing of 1936 lines, arcs and shapes, not listed
Mechanical 1:
  lines w10: 3464.57,1377.95 cw(c3464.57,1299.21) 3543.31,1299.21 3543.31,196.86 ; 3464.57,1377.95 3464.57,1377.95 ; 3464.57,1377.95 2440.94,1377.95 cw(c2440.94,1456.69) 2362.2,1456.69 2362.2,2874.02 cw(c2440.94,2874.02) 2440.94,2952.76 3464.57,2952.76 ccw(c3464.57,3031.5) 3543.31,3031.5 ; 3543.31,196.86 cw(c3346.46,196.86) 3346.46,0 196.85,0.01 cw(c196.85,196.86) -0.01,196.86 0,3346.46 cw(c196.85,3346.46) 196.85,3543.32 3346.46,3543.31 cw(c3346.46,3346.46) 3543.31,3346.46 3543.31,3031.5 ; 3543.31,196.86 3543.31,196.86 ; 3543.31,3031.5 3543.31,3031.5

## Text inside footprints (layer, text, board x,y; h text height)
J2: Mechanical 13 "3" at 1465,2105 h50 r180; Mechanical 13 "2" at 1565,2105 h50 r180; Mechanical 13 "1" at 1665,2105 h50 r180
J3: Mechanical 13 "PCB EDGE" at 95.94,1255.43 h32 r270
J4: Mechanical 13 "PCB Edge" at 2778.35,5.16 h27.56
P1: Top Overlay "1" at 170,745 h30; Top Overlay "2" at 170,845 h30; Top Overlay "40" at 2250,845 h30; Top Overlay "39" at 2250,745 h30
P2: Top Overlay "12" at 2480,250 h30; Top Overlay "1" at 2520,150 h30; Top Overlay "1" at 2480,150 h50; Top Overlay "1" at 1800,150 h30; Top Overlay "2" at 1800,250 h30